# Altium PCB smart  controller.PcbDoc
Units mm, origin at the board's own origin, x right, y up, seen from the top; angles counter-clockwise.
Board outline 150 x 55 mm, 2 copper layers (Top Layer, Bottom Layer); 17 components, 27 nets, 110 pads, 4 vias.
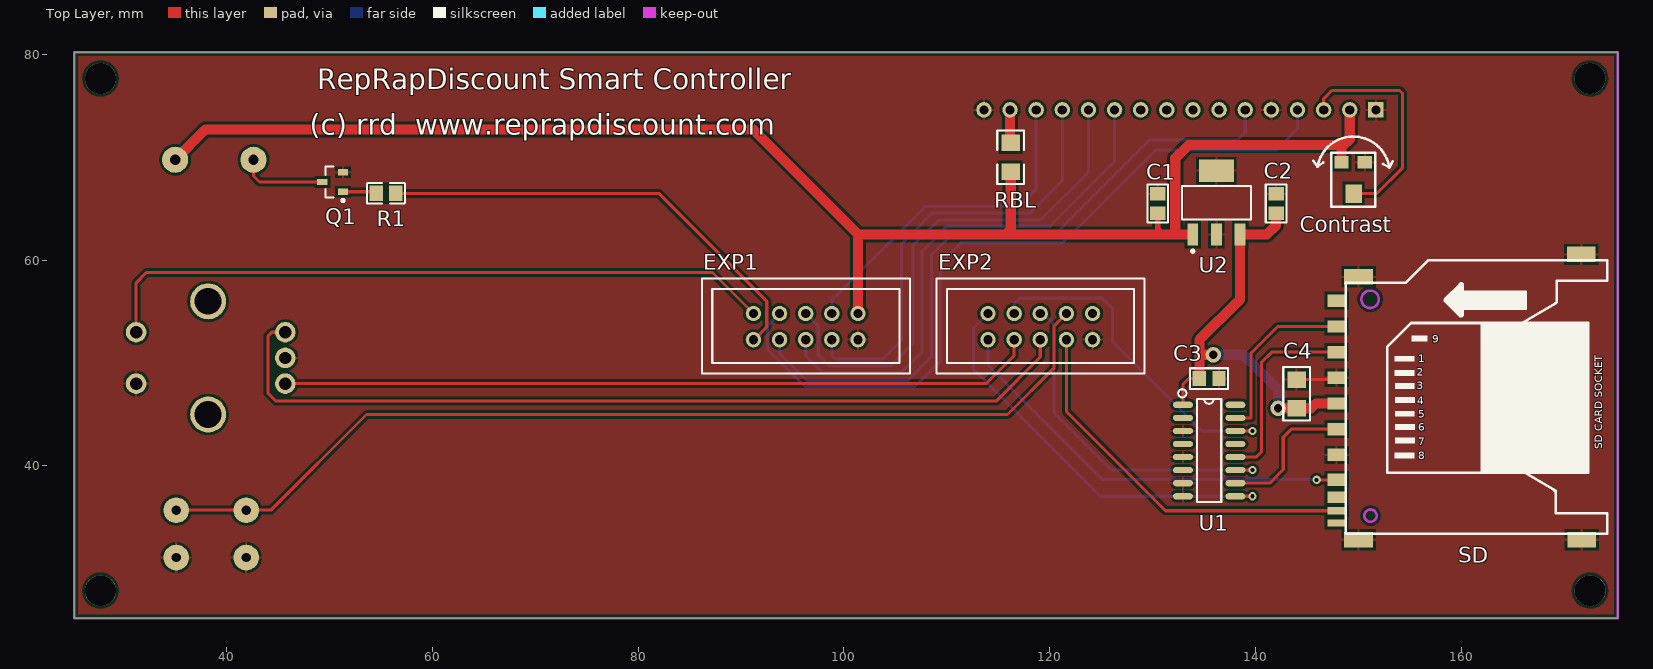
[diagram p0: Top Layer view]
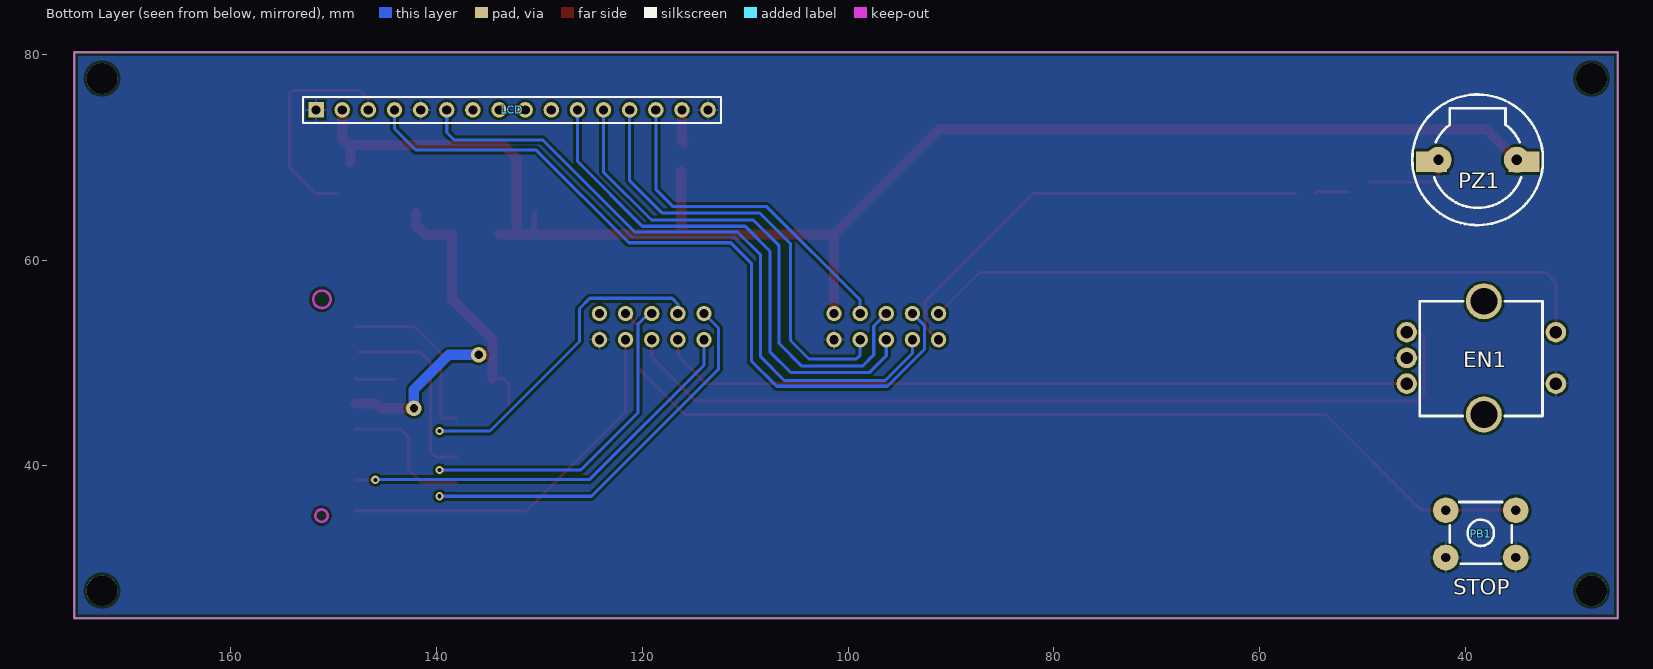
[diagram p1: Bottom Layer view, seen from below]

## Layer stack, top to bottom
Top Layer: signal copper 0.0356
Dielectric: dielectric 0.32, FR-4, Dk 4.8
Bottom Layer: signal copper 0.0356

## Board outline
25.2,25.2 175.2,25.2 175.2,80.2 25.2,80.2

## Design rules (kind name [scope] priority, off if disabled: settings)
Clearance [All] p1: gap=0.254
HoleSize [All] p1: absolutevalues=TRUE maxlimit=5 minlimit=0.025 maxpercent=80.000 minpercent=20.000
PolygonConnect [All] p1: connectstyle=Relief reliefconductorwidth=0.254 reliefentries=4 polygonreliefangle="90 Angle"
RoutingVias [All] p1: holewidth=0.711 width=1.27 viastyle="Through Hole" minholewidth=0.711 minwidth=1.27 maxholewidth=0.711 maxwidth=1.27
SilkToSilkClearance [All] p1: silktosilkclearance=0.1
SilkscreenOverComponentPads [All] p1: minsilkscreentomaskgap=0.1
SolderMaskExpansion [All] p1: expansion=0.102
Width [All] p1: maxlimit=1 minlimit=0.3 preferedwidth=0.3 minimp=50.000000 maximp=50.000000 favimp=50.000000
25 further rules are at their usual default settings.

## Components (designator, comment, footprint, x,y, rotation, side; value= is the part's Value field where it differs from the comment)
C1 "100nF" Cap2012-0805 130.5,65.5 r270 top
C2 "100nF" Cap2012-0805 142,65.5 r270 top
C3 "100nF" Cap2012-0805 135.5,48.5 r180 top
C4 "1uF" Cap3216-1206 144,47 r270 top
Contrast "10K" "RES TRIMPOT" 149.5,68 r180 top
EN1 "BC111E5244B2" "ROTARY ENCODER" 45.7,50.5 r0 bottom locked
EXP1 "Header 5X2" HDR2X5_EXP 86.2,49 r0 top
EXP2 "Header 5X2" HDR2X5_EXP 109,49 r0 top
LCD "Character lcd" HDR1X16 151.704,74.611 r180 bottom locked
PB1 "STOP" "SW 6X6MM" 41.5,30.5 r180 bottom locked
PZ1 "PIEZO" "PIEZO 11MM" 42.616,69.759 r180 bottom locked
Q1 "BC817" SOT23_L 50.3,67.6 r180 top
R1 "1K" "Res 2012-0805" 55.5,66.5 r0 top
RBL "68" "Res 3216-1206" 116.2,70 r270 top
SD "SD card" "SD_card socket" 159.8,46.7 r90 top locked
U1 "74HC4050" SO16N 135.5,41.5 r0 top
U2 "MIC5209" SOT-223 136.2,65.6 r0 top

## Footprints (in the part's own frame and the unit in brackets; to place one, negate y for a bottom-side part, rotate by r counter-clockwise, add the part's x,y. Pads: shape width x height; smd on the part's side, far side on the other; paste and mask are expansions set on the pad)
Cap2012-0805 [mm]
  rect 1.3x1.5 smd: 1(-0.95,0) 2(0.95,0)
  silkscreen extent -1.85,-1 1.85,1, body extent -1,-0.65 1,0.6, height 1.5
Cap3216-1206 [mm]
  rect 1.6x1.8 smd: 1(-1.4,0) 2(1.4,0)
  silkscreen extent -2.6,-1.3 2.6,1.3, body extent -1.57,-0.85 1.63,0.85, height 1.6
HDR1X16 [mm] "Connector; Header; 16 Position"
  rect 1.5x1.5 hole 0.9: 1(0,0)
  round 1.5 hole 0.9: 2(2.54,0) 3(5.08,0) 4(7.62,0) 5(10.16,0) 6(12.7,0) 7(15.24,0) 8(17.78,0) 9(20.32,0) 10(22.86,0) 11(25.4,0) 12(27.94,0) 13(30.48,0) 14(33.02,0) 15(35.56,0) 16(38.1,0)
  silkscreen extent -1.27,-1.27 39.37,1.27
HDR2X5_EXP [mm] "Connector; Header; 5x2 Position"
  round 1.5 hole 0.9: 1(5.004,3.277) 2(5.004,5.817) 3(7.544,3.277) 4(7.544,5.817) 5(10.084,3.277) 6(10.084,5.817) 7(12.624,3.277) 8(12.624,5.817) 9(15.164,3.277) 10(15.164,5.817)
  silkscreen extent 0,0 20.2,9.2
"PIEZO 11MM" [mm]
  rect 3x2 smd: 1(-0.686,-0.178) 2(8.314,-0.178)
  round 2.54 hole 1: 1(0,0) 2(7.62,0)
  silkscreen extent -2.54,-6.35 10.16,6.35
"Res 2012-0805" [mm]
  rect 1.3x1.5 smd: 1(-0.95,0) 2(0.95,0)
  silkscreen extent -1.85,-1 1.82,1, body extent -1,-0.63 1,0.63, height 1.5
"Res 3216-1206" [mm]
  rect 1.6x1.8 smd: 1(-1.4,0) 2(1.4,0)
  silkscreen extent -2.6,-1.3 2.6,1.3, body extent -1.58,-0.85 1.63,0.85, height 1.6
"RES TRIMPOT" [mm]
  rect 1.4x1.2 smd: 1(-1.138,-1.523) 3(1.138,-1.523)
  rect 1.6x1.8 smd: 2(-0.033,1.523)
  silkscreen extent -2.13,-2.44 2.13,2.82
"ROTARY ENCODER" [mm]
  round 2 hole 1.2: 1(0,-2.5) 2(0,0) 3(0,2.5) 4(-14.5,2.5) 5(-14.5,-2.5)
  round 3.5 hole 2.6: 6(-7.5,5.5) 7(-7.5,-5.5)
  silkscreen extent -13.2,-5.51 -1.27,5.64
"SD_card socket" [mm]
  rect 1.2x1.8 smd: 1(6.858,11.917) 2(4.369,11.917) 3(1.875,11.908) 4(-0.625,11.908) 5(-3.125,11.908) 6(-5.625,11.908) 7(-8.05,11.908) 9(9.375,11.908)
  rect 1.1x1.8 smd: 8(-9.754,11.917)
  rect 0.7x1.8 smd: 10(-11.05,11.908) 11(-12.243,11.917)
  rect 1.5x2.8 smd: 12(-13.868,-11.917) 12(-13.868,9.774) 12(11.684,9.774) 12(13.868,-11.866)
  Keep-Out Layer circle w0.254: c9.5,8.657 r0.85
  Keep-Out Layer circle w0.254: c-11.532,8.617 r0.6
  silkscreen extent -13.27,-14.38 13.3,11.02
SO16N [mm] "SOIC, 16-Leads, Body 10.0x4.0mm (max), Pitch 1.27mm, IPC Medium Density"
  oval 1.95x0.6 smd: 1(-2.55,4.445) 2(-2.55,3.175) 3(-2.55,1.905) 4(-2.55,0.635) 5(-2.55,-0.635) 6(-2.55,-1.905) 7(-2.55,-3.175) 8(-2.55,-4.445) 9(2.55,-4.445) 10(2.55,-3.175) 11(2.55,-1.905) 12(2.55,-0.635) 13(2.55,0.635) 14(2.55,1.905) 15(2.55,3.175) 16(2.55,4.445)
  silkscreen extent -3.01,-5 1.18,5.96, body extent -2,-5 2,5, height 1.75
SOT23_L [mm] "SOT23, 3-Leads, Body 2.9x1.3mm, Pitch 0.95mm, Lead Span 2.3mm, IPC High Density"
  rect 1x0.6 smd: 1(-1,0.95) 2(-1,-0.95) 3(1,0)
  silkscreen extent -1.13,-1.5 0.7,1.92, body extent -0.7,-1.5 0.7,1.5, height 1.1
SOT-223 [mm]
  rect 1.05x2.15 smd: 1(-2.3,-3.1) 2(0,-3.1) 3(2.3,-3.1)
  rect 3.4x2.15 smd: 4(0,3.1)
  silkscreen extent -3.35,-4.85 3.35,1.63
"SW 6X6MM" [mm]
  round 2.5 hole 0.9: 1(-0.4,5.2) 1(6.4,5.2) 2(-0.4,0.6) 2(6.4,0.6)
  silkscreen extent 0,0 5.99,5.99

## Part data
C1 C2 C3 C4: library part "Cap Semi", "Capacitor (Semiconductor SIM Model)"
Contrast: library part POT
EN1: library part Encoder, "Rotary encoder mechanical"
EXP1 EXP2: "Header, 5-Pin, Dual row"
LCD: library part "LCD characther"
PB1: library part SW-PB
Q1: library part BC847C, "NPN General-purpose Transistor"
R1 RBL: library part Res3, "Resistor"
U1: "Hex high-to-low level shifter"
U2: "500mA Low-Noise LDO Regulator"

## Free pads (board coordinates)
  round 1.5 hole 0.8: 1(142.2,45.6) 2(135.9,50.8)
  round 3 hole 3: 3(172.52,27.876) 5(27.74,77.66) 5(172.52,77.66) 6(27.74,27.876)

## Via types
v1: diameter 0.8, hole 0.4, Top Layer to Bottom Layer, tented both sides, 4 vias

## Nets (pads, with @x,y where several pads share a name; then routed paths per layer and width w, separated by ;. In a path a pad name is that pad's centre, name@x,y a point inside that pad or via, vN(x,y) a via of type N, cw(c..) or ccw(c..) an arc to the next point about the centre after c; other vN are vias at no path point)
3V3: C2.2 C3.2 C4.2 pad.1 pad.2 SD.4 U1.1 U2.3 | length 41.1
  Top Layer w0.3: U1.1 132.95,47.95 133.5,48.5 C3.2
  Top Layer w1: C3.2 134.55,52.25 138.5,56.2 U2.3 141.1,62.5 142,63.4 C2.2 ; 134.65,50.8 pad.2 ; pad.1 C4.2 145.4,45.6 145.875,46.075 SD.4
  Bottom Layer w1: pad.2 138.8,50.8 142.2,47.4 pad.1
BEEPER: EXP1.1 R1.2 | length 44.6
  Top Layer w0.3: R1.2 82,66.5 92.5,56 92.5,53.5 EXP1.1@91.277,52.277
BTN_EN1: EN1.1 EXP2.5 | length 86.2
  Top Layer w0.3: EN1.1 44.4,53 44,52.6 44,47.1 44.8,46.3 114.8,46.3 119.084,50.584 EXP2.5
BTN_EN2: EN1.3 EXP2.3 | length 73.5
  Top Layer w0.3: EN1.3 113.8,48 116.544,50.744 EXP2.3
BTN_ENC: EN1.5 EXP1.2 | length 66.9
  Top Layer w0.3: EN1.5 31.2,57.8 32.2,58.8 87.22,58.8 EXP1.2
GND: C1.1 C2.1 C3.1 C4.1 Contrast.1 EN1.2 EN1.4 EXP1.9 EXP2.9 LCD.1 LCD.5 LCD.16 PB1.2 Q1.2 SD.3 SD.6 SD.12 U1.3 U1.5 U1.7 U1.8 U2.2 U2.4 | length 4
  Top Layer w0.3: C4.1 147.717,48.4 SD.3
KILL: EXP2.10
LCD4: EXP1.5 LCD.11 | length 51.5
  Bottom Layer w0.3: EXP1.5 96.284,50.716 97.9,49.1 105.6,49.1 107.6,51.1 107.6,60.9 110,63.3 120,63.3 126.304,69.604 LCD.11
LCD5: EXP1.6 LCD.12 | length 50.7
  Bottom Layer w0.3: EXP1.6 97.5,53.6 97.5,50.8 98.6,49.7 104.5,49.7 106.7,51.9 106.7,61.4 109.2,63.9 119.1,63.9 123.764,68.564 LCD.12
LCD6: EXP1.7 LCD.13 | length 43.6
  Bottom Layer w0.3: EXP1.7 98.824,50.776 99.2,50.4 103.8,50.4 105.6,52.2 105.6,61.6 108.6,64.6 118.1,64.6 121.224,67.724 LCD.13
LCD7: EXP1.8 LCD.14 | length 33.4
  Bottom Layer w0.3: EXP1.8 98.824,56.124 107.9,65.2 117,65.2 118.684,66.884 LCD.14
LCDE: EXP1.3 LCD.6 | length 65.7
  Bottom Layer w0.3: EXP1.3 93.744,50.956 96.4,48.3 106.2,48.3 108.5,50.6 108.5,60.5 110.746,62.746 120.746,62.746 129.7,71.7 138.3,71.7 139.004,72.404 LCD.6
LCDRS: EXP1.4 LCD.4 | length 74.7
  Bottom Layer w0.3: EXP1.4 92.59,53.663 92.59,51.327 96.171,47.746 106.946,47.746 109.4,50.2 109.4,59.7 111.4,61.7 121.3,61.7 130.3,70.7 142,70.7 144.084,72.784 LCD.4
NetContrast_2: Contrast.2 LCD.3 | length 22.2
  Top Layer w0.3: LCD.3 146.624,75.7 147.424,76.5 154,76.5 154.3,76.2 154.3,69 151.777,66.477 Contrast.2
NetLCD_15: LCD.15 RBL.1 | length 3.3
  Top Layer w1: RBL.1@116,71.4 116.144,71.544 LCD.15
NetPZ1_1: PZ1.1 Q1.3 | length 8.5
  Top Layer w0.3: PZ1.1@42.616,69.759 42.616,68.184 43.2,67.6 Q1.3
NetQ1_1: Q1.1 R1.1 | length 3.3
  Top Layer w0.3: Q1.1 54.4,66.65 R1.1
NetSD_1: SD.1 U1.15 | length 17.2
  Top Layer w0.3: U1.15 139.575,44.675 139.575,50.975 142.158,53.558 SD.1
NetSD_2: SD.2 U1.12 | length 18.9
  Top Layer w0.3: U1.12 140.065,40.865 140.6,41.4 140.6,50.1 141.569,51.069 SD.2@147.6,51.069
NetSD_5: SD.5 U1.10 | length 13.9
  Top Layer w0.3: U1.10 141.375,38.325 142.7,39.65 142.7,42.8 143.475,43.575 SD.5
PB1_(SCK): EXP2.2 U1.9 | length 39.9
  Top Layer w0.3: U1.9 v1(139.7,37.055)
  Bottom Layer w0.3: EXP2.2 112.6,53.413 112.6,49.4 124.945,37.055 v1(139.7,37.055)
PB2_(MOSI): EXP2.6 U1.11 | length 33.6
  Top Layer w0.3: U1.11 v1(139.7,39.595)
  Bottom Layer w0.3: EXP2.6 119.383,54.817 120.4,53.8 120.4,45.2 126.005,39.595 v1(139.7,39.595)
PB3_(MISO): EXP2.1 SD.7 | length 41.2
  Top Layer w0.3: v1(145.95,38.65) SD.7
  Bottom Layer w0.3: EXP2.1 114.004,49.796 125.1,38.7 145.9,38.7 v1@146.1,38.5
RESET: EXP2.8 PB1.1 | length 96.8
  Top Layer w0.3: PB1.1@35.1,35.7 41.9,35.7 44.3,35.7 53.6,45 115.9,45 120.4,49.5 120.4,53.593 EXP2.8
SD_CSEL: EXP2.4 U1.14 | length 33.2
  Top Layer w0.3: U1.14 v1(139.7,43.405)
  Bottom Layer w0.3: EXP2.4 116.544,55.744 117.1,56.3 125.1,56.3 126.1,55.3 126.1,52.1 134.795,43.405 v1(139.7,43.405)
SD_DET: EXP2.7 SD.10 | length 37.3
  Top Layer w0.3: EXP2.7 121.624,45.276 131.25,35.65 SD.10
VCC: C1.2 Contrast.3 EXP1.10 LCD.2 PZ1.2 RBL.2 U2.1 | length 150.3
  Top Layer w0.5: C1.2 130.5,63.1 131.1,62.5 ; 148.362,70.962 148.6,71.2
  Top Layer w1: PZ1.2@34.996,69.759 37.936,72.7 91.2,72.7 101.4,62.5 116.3,62.5 ; EXP1.10 101.364,62.5 ; 116,62.8 116.3,62.5 ; 116.2,62.8 RBL.2 ; U2.1 132.2,62.5 ; Contrast.3 148.362,70.962 ; LCD.2 149.164,71.764 148.6,71.2 133.5,71.2 132.2,69.9 132.2,62.5 ; 116.3,62.5 131.1,62.5 132.2,62.5
pads on no net: EN1.6 EN1.7 LCD.7 LCD.8 LCD.9 LCD.10 SD.8 SD.9 SD.11 U1.2 U1.4 U1.6 U1.13 U1.16

## Polygon pours and split planes (outlines as drawn)
GND on Top Layer "Bottom Layer-No Net" (solid, remove dead copper): 175.3,80.3 175.5,80.1 175.5,25.2 25.1,25.2 25,25.1 24.9,25.2 24.9,80.3
GND on Bottom Layer "Bottom Layer-No Net" (solid, remove dead copper): 175.3,80.3 175.5,80.1 175.5,25.2 25.1,25.2 25,25.1 24.9,25.2 24.9,80.3

## Keep-outs
Keep-Out Layer:
  the board outline again, w0.254

## Silkscreen, mask and mechanical layers (free items; w line width, h text height)
Top Overlay:
  rectangle: 161.894,39.341 172.36,53.893
  rectangle: 159.994,55.614 166.267,56.564
  rectangle: 159.277,55.291 159.994,57.101
  rectangle: 159.582,54.969 159.994,55.865
  rectangle: 158.758,55.865 159.582,56.474
  rectangle: 159.035,56.169 159.725,56.644
  rectangle: 159.035,55.596 159.618,56.169
  rectangle: 159.994,56.026 166.267,56.904
  rectangle: 159.994,55.309 166.267,55.721
  rectangle: 155.155,52.101 156.732,52.675
  rectangle: 153.507,50.13 155.442,50.703
  rectangle: 153.507,48.768 155.442,49.341
  rectangle: 153.542,47.477 155.478,48.051
  rectangle: 153.578,42.173 155.514,42.746
  rectangle: 153.578,43.499 155.514,44.072
  rectangle: 153.578,46.115 155.514,46.689
  rectangle: 153.542,44.789 155.478,45.363
  rectangle: 153.524,40.721 155.46,41.295
  lines w0.254: 145.625,69.672 146.027,69.098 ; 146.6,69.5 146.027,69.098 ; 152.4,69.352 153.006,69.002 ; 153.356,69.608 153.006,69.002 ; 155.693,53.893 155.119,53.893 ; 159.994,56.85 160.048,56.904 166.267,56.904 166.267,55.309 160.227,55.309 160.173,55.363 ; 146.027,69.098 cw(c149.508,68.485) 153.006,69.002 ; 154.869,39.341 172.36,39.341 172.36,53.893 157.234,53.893 155.119,53.893 ; 154.869,39.341 154.869,39.341 ; 154.869,39.341 152.79,39.341 152.79,51.564 155.119,53.893 ; 159.994,55.614 166.267,55.614 166.267,56.564 159.994,56.564 159.994,55.614
  lines w0.5: 159.994,54.7 159.994,57.603
  lines w0.508: 159.958,54.664 158.507,56.116 159.994,57.603
  text "RepRapDiscount Smart Controller" at 48.8,76.6 h2
  text "(c) rrd  www.reprapdiscount.com" at 48.1,72.2 h2
  text "9" at 157.2,52 h0.76
  text "1" at 155.8,50.094 h0.76
  text "2" at 155.657,48.768 h0.76
  text "3" at 155.693,47.442 h0.76
  text "4" at 155.729,46.008 h0.76
  text "5" at 155.8,44.682 h0.76
  text "6" at 155.8,43.427 h0.76
  text "7" at 155.836,42.029 h0.76
  text "SD CARD SOCKET" at 173.722,41.635 h0.76 r90
  text "8" at 155.836,40.667 h0.76
Mechanical 1:
  text "Data2" at 156.876,52.03 h0.76
  text "CS" at 156.732,50.094 h0.76
  text "Data IN" at 156.732,48.732 h0.76
  text "VSS1" at 156.661,47.37 h0.76
  text "VDD" at 156.661,46.151 h0.76
  text "CLK" at 156.804,44.789 h0.76
  text "VSS2" at 156.732,43.355 h0.76
  text "Data OUT" at 156.804,42.065 h0.76
  text "Data1" at 156.876,40.631 h0.76